# Altium PCB PCB1.PcbDoc
Units mm, origin at the board's own origin, x right, y up, seen from the top; angles counter-clockwise.
Board outline 60 x 43.5 mm, 2 copper layers (Top Layer, Bottom Layer); 9 components, 7 nets, 56 pads, 0 vias.
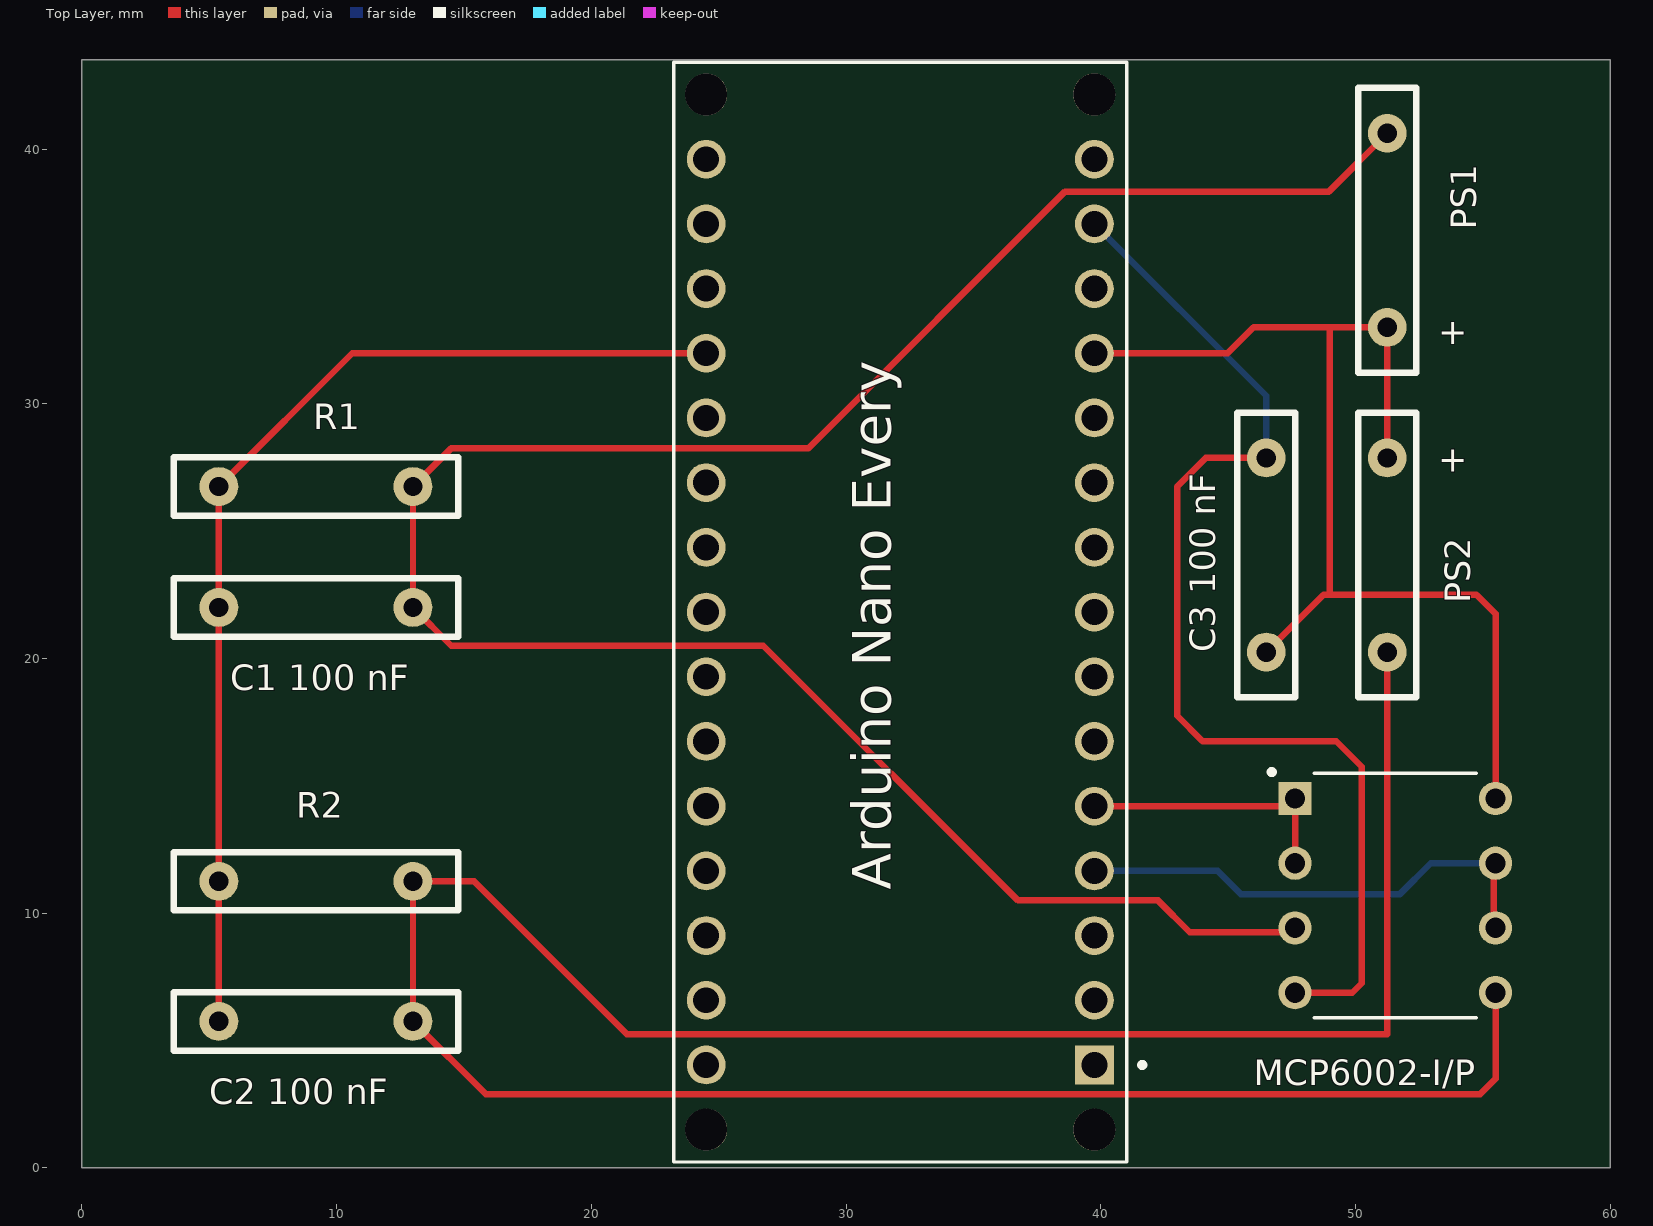
[diagram p0: Top Layer view]
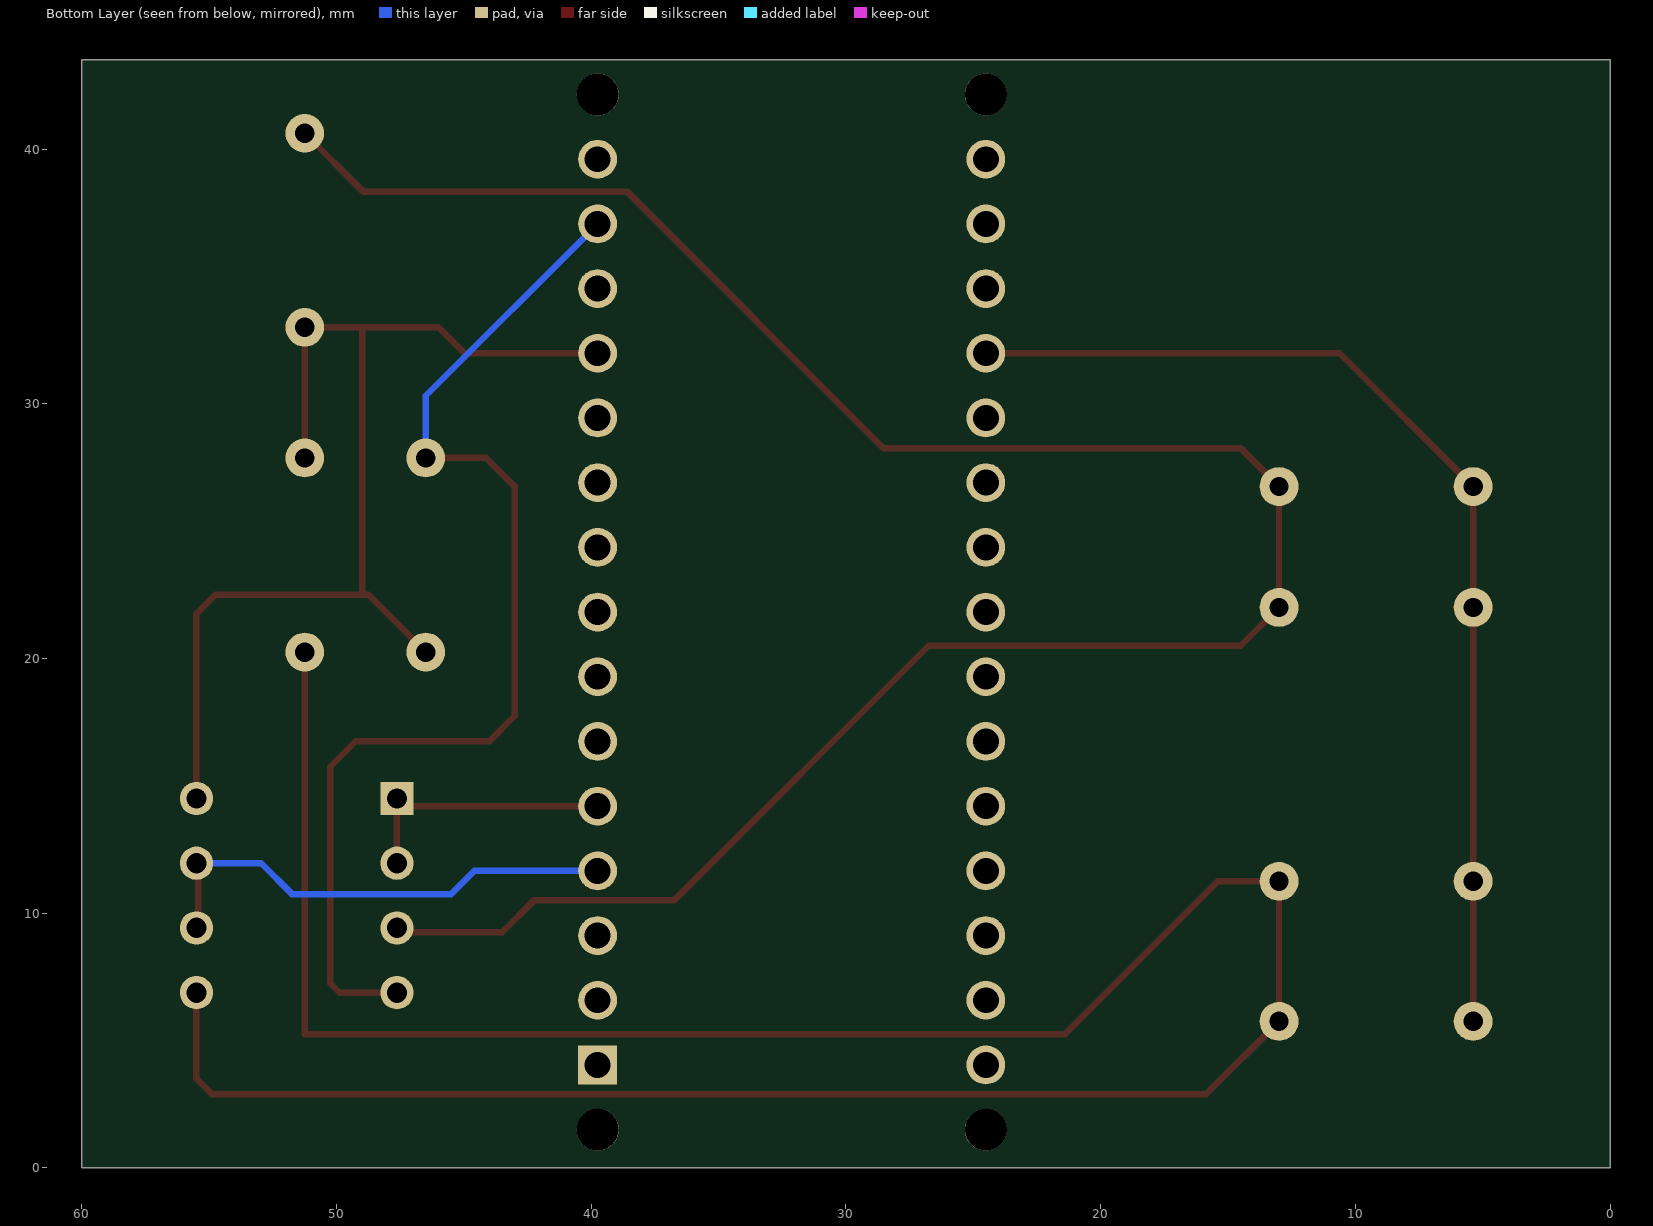
[diagram p1: Bottom Layer view, seen from below]

## Layer stack, top to bottom
Top Solder: solder mask 0.0102, Solder Resist, Dk 3.5
Top Layer: signal copper 0.0356
Dielectric 1: dielectric 0.32, FR-4, Dk 4.8
Bottom Layer: signal copper 0.0356
Bottom Solder: solder mask 0.0102, Solder Resist, Dk 3.5

## Board outline
0,0 60,0 60,43.5 0,43.5

## Design rules (kind name [scope] priority, off if disabled: settings)
Clearance [All] p1: gap=0.254 ignorepadtopadclearanceinfootprint=FALSE except(0: Arc-Hole Track-Hole SMDPad-Hole THPad-Hole Via-Hole Fill-Hole Poly-Hole Region-Hole Text-Hole)
PolygonConnect [All] p1: connectstyle=Relief reliefconductorwidth=0.254 reliefentries=4 polygonreliefangle="90 Angle" airgapwidth=0.254
RoutingVias [All] p1: holewidth=0.711 width=1.27 viastyle="Through Hole" minholewidth=0.711 minwidth=1.27 maxholewidth=0.711 maxwidth=1.27
SolderMaskExpansion [All] p1: expansion=0.102 istentingtop=FALSE
Width [All] p1: maxlimit=0.254 minlimit=0.254 preferedwidth=0.254
30 further rules are at their usual default settings.

## Components (designator, comment, footprint, x,y, rotation, side; value= is the part's Value field where it differs from the comment)
"Arduino Nano Every" "ABX00028" MODULE_ABX00028 32.13,21.82 r90 top
"C1 100 nF" "2 p female connector strainght 2.54 mm" "2 P FEMALE CONNECTOR STRAINGHT  2.54 MM" 13,22 r180 top
"C2 100 nF" "2 p female connector strainght 2.54 mm" "2 P FEMALE CONNECTOR STRAINGHT  2.54 MM" 13,5.75 r180 top
"C3 100 nF" "2 p female connector strainght 2.54 mm" "2 p female connector strainght  2.54 mm" 46.5,20.25 r90 top
MCP6002-I/P "MCP6002-I/P" DIP787W46P254L927H533Q8 51.565,10.69 r0 top
PS1 "2 p female connector strainght 2.54 mm" "2 p female connector strainght  2.54 mm" 51.25,33 r90 top
PS2 "2 p female connector strainght 2.54 mm" "2 p female connector strainght  2.54 mm" 51.25,27.87 r270 top
R1 "2 p female connector strainght 2.54 mm" "2 P FEMALE CONNECTOR STRAINGHT  2.54 MM" 13,26.75 r180 top
R2 "2 p female connector strainght 2.54 mm" "2 P FEMALE CONNECTOR STRAINGHT  2.54 MM" 13,11.25 r180 top

## Footprints (in the part's own frame and the unit in brackets; to place one, negate y for a bottom-side part, rotate by r counter-clockwise, add the part's x,y. Pads: shape width x height; smd on the part's side, far side on the other; paste and mask are expansions set on the pad)
"2 P FEMALE CONNECTOR STRAINGHT  2.54 MM" [mil]
  round 60 hole 30: 1(0,0) 2(300,0)
  silkscreen extent -70,-45 370,45
"2 p female connector strainght  2.54 mm" [mil]
  round 60 hole 30: 1(0,0) 2(300,0)
  silkscreen extent -70,-45 370,45
DIP787W46P254L927H533Q8 [mm]
  rect 1.308x1.308 hole 0.8: 1(-3.935,3.81)
  round 1.308 hole 0.8: 2(-3.935,1.27) 3(-3.935,-1.27) 4(-3.935,-3.81) 5(3.935,-3.81) 6(3.935,-1.27) 7(3.935,1.27) 8(3.935,3.81)
  silkscreen extent -4.95,-4.8 3.18,4.95
MODULE_ABX00028 [mil]
  rect 60x60 / inner round 60 / far side rect 60x60 hole 40: 1(-700,-300)
  round 60 hole 40: 2(-600,-300) 3(-500,-300) 4(-400,-300) 5(-300,-300) 6(-200,-300) 7(-100,-300) 8(0,-300) 9(100,-300) 10(200,-300) 11(300,-300) 12(400,-300) 13(500,-300) 14(600,-300) 15(700,-300) 16(700,300) 17(600,300) 18(500,300) 19(400,300) 20(300,300) 21(200,300) 22(100,300) 23(0,300) 24(-100,300) 25(-200,300) 26(-300,300) 27(-400,300) 28(-500,300) 29(-600,300) 30(-700,300)
  round 65 hole 65 unplated: ""(-800,-300) ""(-800,300) ""(800,-300) ""(800,300)
  silkscreen extent -850,-378 850,350, body extent -895,-350 850,350, height 236

## Part data
"Arduino Nano Every": library part CMP-039-000001-1, "Arduinoâ€™s 5V compatible board in the smallest available form factor: 45x18mm!", Package=None, Availability="Not in stock", Check_prices=https://www.snapeda.com/parts/Arduino%20Nano%20Every/Arduino/view-part/?ref=eda, Component Type=Standard, Design Item ID=ABX00028, MF=Arduino, MP="Arduino Nano Every", Pin Count=30, Price=None, SnapEDA_Link=https://www.snapeda.com/parts/Arduino%20Nano%20Every/Arduino/view-part/?ref=snap, Source=ABX00028.SchLib
MCP6002-I/P: library part CMP-014-00003-1, "General Purpose Amplifier 2 Circuit Rail-to-Rail 8-PDIP", Case/Package="DIP-8 Microchip", Availability=Unavailable, Component Type=Standard, Design Item ID=MCP6002-I/P, MF=Microchip, MP=MCP6002-I/P, Pins=8, Price=None, SnapEDA_Link=https://www.snapeda.com/parts/MCP6002-I/P/Microchip/view-part/235723/?ref=snap, Source=SnapEDAsch.SchLib

## Nets (pads, with @x,y where several pads share a name; then routed paths per layer and width w, separated by ;. In a path a pad name is that pad's centre, name@x,y a point inside that pad or via, vN(x,y) a via of type N, cw(c..) or ccw(c..) an arc to the next point about the centre after c; other vN are vias at no path point)
GND: "Arduino Nano Every.19" "C1 100 nF.2" "C2 100 nF.2" R1.2 R2.2 | length 42.3
  Top Layer w0.254: 5.38,5.75 5.38,8.483 R2.2 5.38,22 R1.2 10.61,31.98 24.51,31.98
"NetArduino Nano Every_4": "Arduino Nano Every.4" MCP6002-I/P.6 MCP6002-I/P.7 | length 19.2
  Top Layer w0.254: MCP6002-I/P.6 55.435,9.485 55.435,11.895 MCP6002-I/P.7
  Bottom Layer w0.254: 39.75,11.66 44.601,11.66 44.601,11.649 45.5,10.75 51.75,10.75 52.96,11.96 MCP6002-I/P.7
"NetArduino Nano Every_5": "Arduino Nano Every.5" MCP6002-I/P.1 MCP6002-I/P.2 | length 10.4
  Top Layer w0.254: 39.75,14.2 MCP6002-I/P.1@47.63,14.2 ; MCP6002-I/P.2 MCP6002-I/P.1@47.63,14.2 ; MCP6002-I/P.1 MCP6002-I/P.1@47.63,14.2
"NetArduino Nano Every_12": "Arduino Nano Every.12" "C3 100 nF.1" MCP6002-I/P.8 PS1.1 PS2.1 | length 45
  Top Layer w0.254: 39.75,31.98 44.98,31.98 46,33 49,33 ; 46.5,20.25 48.75,22.5 49,22.5 ; PS2.1 PS1.1 49,33 ; MCP6002-I/P.8 55.5,21.75 54.75,22.5 49,22.5 ; 49,22.5 49,33
"NetArduino Nano Every_14": "Arduino Nano Every.14" "C3 100 nF.2" MCP6002-I/P.4 | length 44.3
  Top Layer w0.254: 46.5,27.87 44.12,27.87 43,26.75 43,17.75 44,16.75 49.25,16.75 50.25,15.75 50.25,7.25 49.88,6.88 MCP6002-I/P.4
  Bottom Layer w0.254: 39.75,37.06 46.5,30.31 46.5,27.87
"NetC1 100 nF_1": "C1 100 nF.1" MCP6002-I/P.3 PS1.2 R1.1 | length 88.7
  Top Layer w0.254: MCP6002-I/P.3 47.46,9.25 43.5,9.25 42.25,10.5 36.754,10.5 26.754,20.5 14.5,20.5 13,22 R1.1 14.495,28.245 28.517,28.245 38.601,38.328 48.958,38.328 PS1.2
"NetC2 100 nF_1": "C2 100 nF.1" MCP6002-I/P.5 PS2.2 R2.1 | length 108.5
  Top Layer w0.254: PS2.2 51.25,5.25 21.399,5.25 15.399,11.25 R2.1 13,5.75 15.853,2.897 54.897,2.897 55.5,3.5 MCP6002-I/P.5
pads on no net: "Arduino Nano Every.1" "Arduino Nano Every.2" "Arduino Nano Every.3" "Arduino Nano Every.6" "Arduino Nano Every.7" "Arduino Nano Every.8" "Arduino Nano Every.9" "Arduino Nano Every.10" "Arduino Nano Every.11" "Arduino Nano Every.13" "Arduino Nano Every.15" "Arduino Nano Every.16" "Arduino Nano Every.17" "Arduino Nano Every.18" "Arduino Nano Every.20" "Arduino Nano Every.21" "Arduino Nano Every.22" "Arduino Nano Every.23" "Arduino Nano Every.24" "Arduino Nano Every.25" "Arduino Nano Every.26" "Arduino Nano Every.27" "Arduino Nano Every.28" "Arduino Nano Every.29" "Arduino Nano Every.30" "Arduino Nano Every."

## Silkscreen, mask and mechanical layers (free items; w line width, h text height)
Top Overlay:
  text "+" at 53.254,32.337 h1
  text "+" at 53.254,27.337 h1